# Altium PCB buck_automotive.PcbDoc
Units mm, origin at the board's own origin, x right, y up, seen from the top; angles counter-clockwise.
Board outline 100 x 17 mm, 4 copper layers (Top Layer, Layer 1, Layer 2, Bottom Layer), stack 1.561 mm thick; 81 components, 31 nets, 247 pads, 101 vias.
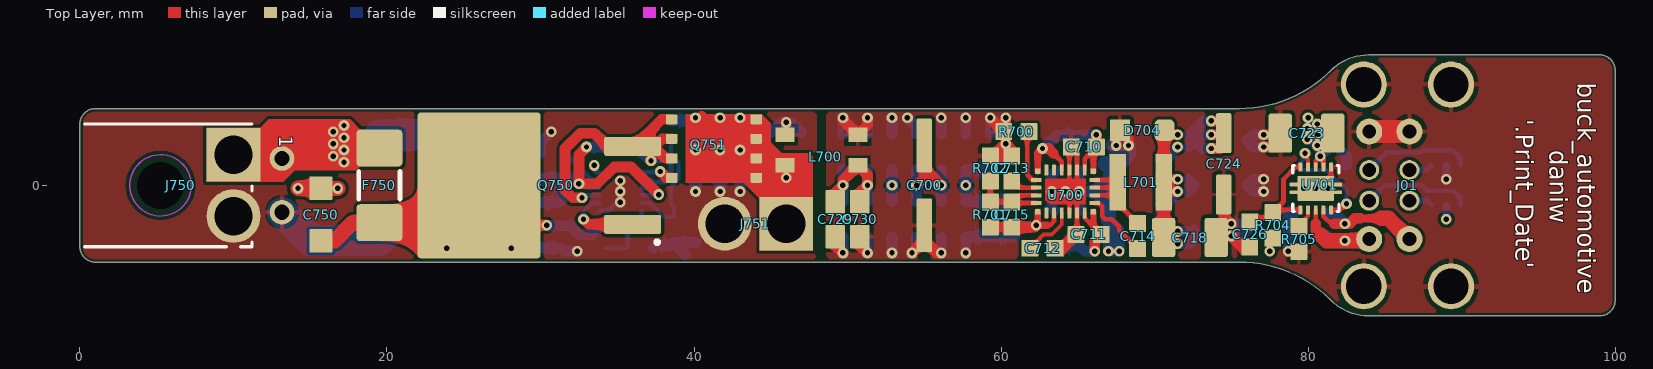
[diagram p0: Top Layer view]
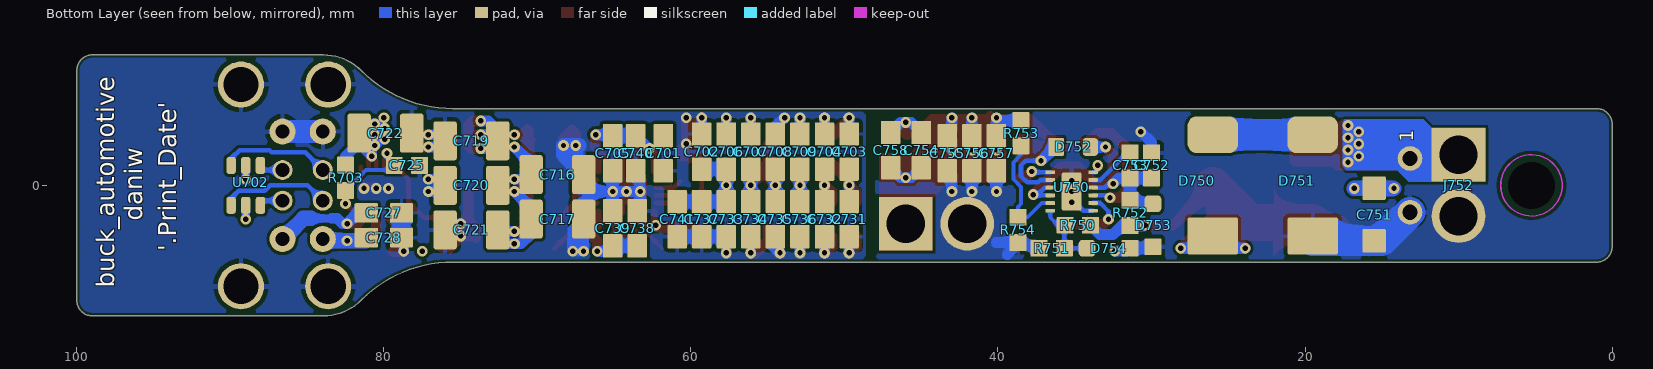
[diagram p1: Bottom Layer view, seen from below]
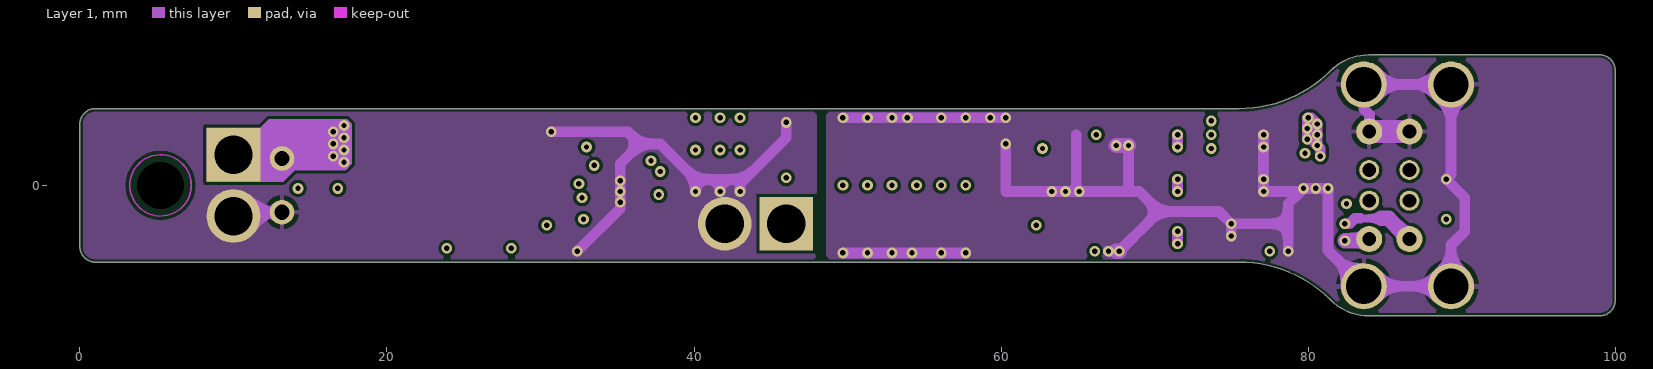
[diagram p2: Layer 1]
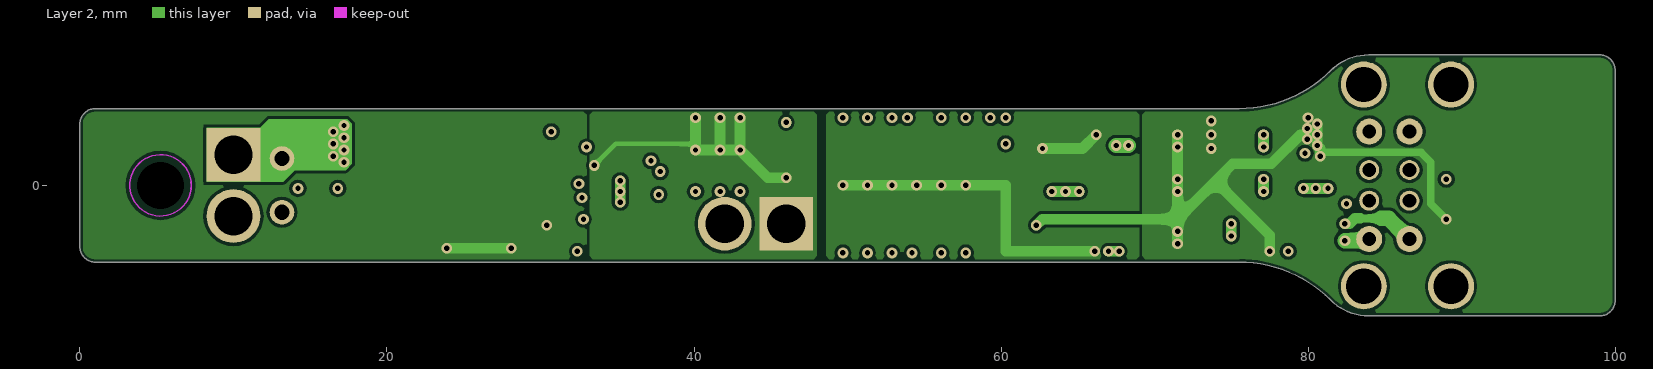
[diagram p3: Layer 2]

## Layer stack, top to bottom
Top Solder: solder mask 0.0102, Solder Resist, Dk 3.5
Top Layer: signal copper 0.0356
Dielectric 2: prepreg 0.11, PP-006, Dk 4.1
Layer 1: signal copper 0.035
Dielectric 1: dielectric 1.2, FR-4, Dk 4.8
Layer 2: signal copper 0.035
Dielectric 3: prepreg 0.11, PP-006, Dk 4.1
Bottom Layer: signal copper 0.0356
Bottom Solder: solder mask 0.0102, Solder Resist, Dk 3.5

## Board outline
0,-4 ccw(c1,-4) 1,-5 75.5,-5 cw(c75.5,-13.45) 81.475,-7.475 ccw(c83.95,-5) 83.95,-8.5 99,-8.5 ccw(c99,-7.5) 100,-7.5 100,7.5 ccw(c99,7.5) 99,8.5 83.95,8.5 ccw(c83.95,5) 81.475,7.475 cw(c75.5,13.45) 75.5,5 1,5 ccw(c1,4) 0,4

## Design rules (kind name [scope] priority, off if disabled: settings)
Clearance [All] p1: gap=0.2 ignorepadtopadclearanceinfootprint=FALSE except(0: Arc-Hole Track-Hole SMDPad-Hole THPad-Hole Via-Hole Fill-Hole Poly-Hole Region-Hole Text-Hole)
ComponentClearance [All] p1: gap=0.2 collisioncheckmode=3 verticalgap=0.2 showdistances=FALSE
HoleSize [All] p1: absolutevalues=TRUE maxlimit=3.2 minlimit=0.3 maxpercent=80.000 minpercent=20.000
HoleToHoleClearance [All] p1: gap=0.3 allowstackedmicrovias=TRUE
MinimumAnnularRing [All] p1: minimumring=0.15
MinimumSolderMaskSliver [All] p1: minsoldermaskwidth=0.1
PolygonConnect [All] p1: thpad.connectstyle=Relief thpad.reliefconductorwidth=0.3 thpad.reliefentries=4 thpad.polygonreliefangle="90 Angle" thpad.airgapwidth=0.3 smdpad.connectstyle=Relief smdpad.reliefconductorwidth=0.25 smdpad.reliefentries=4 smdpad.polygonreliefangle="90 Angle" smdpad.airgapwidth=0.25 via.connectstyle=Direct via.reliefconductorwidth=0.254 via.reliefentries=4 via.polygonreliefangle="90 Angle" via.airgapwidth=0.254
RoutingVias [All] p1: holewidth=0.35 width=0.7 viastyle="Through Hole" minholewidth=0.3 minwidth=0.65 maxholewidth=0.5 maxwidth=3
SilkToSilkClearance [All] p1: silktosilkclearance=0.1
SilkToSolderMaskClearance [IsPad] p1: minsilkscreentomaskgap=0.15 clearancetoexposedcopper=TRUE
SolderMaskExpansion SolderMaskExpansion_Via [IsVia] p1: expansion=0.102 istentingtop=TRUE
SolderMaskExpansion [All] p2: expansion=0.05 istentingtop=FALSE
Width [All] p1: maxlimit=5 minlimit=0.2 preferedwidth=0.2 minimp=50.000000 maximp=50.000000 favimp=50.000000
24 further rules are at their usual default settings.

## Classes and differential pairs
net class Converter: +5V BST DM1 DM2 DP1 DP2 EN1 EN2 FB GND ILIM INTVCC NetU700_1 NetU700_15 NetU700_16 RT SW TR/SS V_Bat_Filt VBUS1 VBUS2
net class Protection: CAP DG EN/UVLO GND_In HG NetC750_2 NetD750_K NetF750_1 NetU751_4 OV "V_ Bat_In" V_Bat V_Int VS

## Components (designator, comment, footprint, x,y, rotation, side; value= is the part's Value field where it differs from the comment)
C700 "100u, 50V" C_ELKO_SMD_6.6X6.6_7.7 55,0 r90 top
C701 "2.2u" C_0805_S 61.8,2.1 r270 bottom
C702 "2.2u" C_0805_S 59.3,2.2 r90 bottom
C703 "2.2u" C_0805_S 49.7,2.2 r90 bottom
C704 "2.2u" C_0805_S 51.3,2.2 r90 bottom
C705 "2.2u" C_0805_S 65.1,2.1 r270 bottom
C706 "2.2u" C_0805_S 57.7,2.2 r90 bottom
C707 "2.2u" C_0805_S 56.1,2.2 r90 bottom
C708 "2.2u" C_0805_S 54.5,2.2 r90 bottom
C709 "2.2u" C_0805_S 52.9,2.2 r90 bottom
C710 "1u" C_0603_S 65.4,2.5 r0 top
C711 "1u" C_0603_S 65.7,-3.2 r0 top
C712 "1u" C_0603_S 62.7,-4.1 r0 top
C713 "10n" C_0603_S 60.7,1.1 r270 top
C714 "1u" C_0603_S 68.9,-3.3 r90 top
C715 "10pF" C_0603_S 60.7,-1.9 r270 top
C716 "47u, 10V" C_1210_S 68.7,0.7 r180 bottom
C717 "47u, 10V" C_1210_S 68.7,-2.2 r180 bottom
C718 "47u, 10V" C_1210_S 72.3,-3.4 r0 top
C719 "47u, 10V" C_1210_S 74.3,2.9 r0 bottom
C720 "47u, 10V" C_1210_S 74.3,0 r0 bottom
C721 "47u, 10V" C_1210_S 74.3,-2.9 r0 bottom
C722 "47u, 10V" C_1210_S 79.9,3.4 r180 bottom
C723 "47u, 10V" C_1210_S 79.9,3.4 r180 top
C724 "100u, 10V" C_ELKO_SMD_5.3X5.3_5.4 74.5,1.4 r90 top
C725 "1uF" C_0603_S 78.5,1.3 r0 bottom
C726 "1uF" C_0603_S 76.2,-3.2 r90 top
C727 "10uF" C_0805_S 80,-1.8 r0 bottom
C728 "10uF" C_0805_S 80,-3.4 r0 bottom
C729 "2.2u" C_0805_S 49.2,-2.2 r270 top
C730 "2.2u" C_0805_S 50.8,-2.2 r270 top
C731 "2.2u" C_0805_S 49.7,-2.2 r270 bottom
C732 "2.2u" C_0805_S 51.3,-2.2 r270 bottom
C733 "2.2u" C_0805_S 57.7,-2.2 r270 bottom
C734 "2.2u" C_0805_S 56.1,-2.2 r270 bottom
C735 "2.2u" C_0805_S 54.5,-2.2 r270 bottom
C736 "2.2u" C_0805_S 52.9,-2.2 r270 bottom
C737 "2.2u" C_0805_S 59.3,-2.2 r270 bottom
C738 "2.2u" C_0805_S 63.5,-2.8 r90 bottom
C739 "2.2u" C_0805_S 65.1,-2.8 r90 bottom
C740 "2.2u" C_0805_S 63.6,2.1 r270 bottom
C741 "2.2u" C_0805_S 60.9,-2.2 r270 bottom
C750 "0.1uF" C_1206_S 15.7,-1.9 r90 top
C751 "0.1uF" C_1206_S 15.5,-1.9 r270 bottom
C752 "1uF" C_0603_S 30,1.3 r270 bottom
C753 "0.1uF" C_0603_S 31.4,1.3 r90 bottom
C754 "2.2u" C_0805_S 45,2.3 r90 bottom
C755 "2.2u" C_0805_S 43.3,2.1 r270 bottom
C756 "2.2u" C_0805_S 41.7,2.1 r270 bottom
C757 "2.2u" C_0805_S 40.1,2.1 r270 bottom
C758 "2.2u" C_0805_S 47,2.3 r90 bottom
D704 "SMF5.0A" SOD123FL 69.2,3.6 r0 top
D750 "5.0SMDJ22A" DO-214AB 26,0 r90 bottom
D751 "5.0SMDJ22A" DO-214AB 19.5,0 r90 bottom
D752 "BAS21HT1G" SOD-323 35.1,2.5 r180 bottom
D753 "PTVS60VS1UR" SOD123W 29.9,-4 r90 bottom
D754 "PTVS60VS1UR" SOD123W 31.4,-4.1 r0 bottom
F750 "500mA" "LITTELFUSE 157SERIE" 19.5,0 r270 top
J01 "CON-USBR-A-D-S-O-TH" CON-USBR-A-D-S-O-TH 100.01,0 r90 top
J750 "CON-Molex-Ultrafit-2-RA" CON-MOLEX-ULTRAFIT-172310-1X02 0,0 r270 top
J751 "CON2" HEADER_2_RM_2.54 44,-2.5 r180 top
J752 "CON2" HEADER_2_RM_2.54 10,0 r270 bottom
L700 "ACM4520-901-2P" ACM4520-2P 48.3,2.3 r180 top
L701 "3.3uH" 4020 69.1,0.2 r0 top
Q750 "FDB52N20TM" TO-263-3-2 29.9,0 r180 top
Q751 "FDMS86380-F085" SON5X6 41.3,2.4 r0 top
R700 "39k" R_0603_S 61,3.5 r0 top
R701 "100k" R_0603_S 59.3,-1.9 r90 top
R702 "24.9k" R_0603_S 59.3,1.1 r90 top
R703 "100k" R_0603_S 82.5,0.5 r270 bottom
R704 "100k" R_0603_S 77.7,-2.6 r90 top
R705 "22k" R_0603_S 79.4,-3.5 r270 top
R750 "33k" R_0603_S 34.8,-2.6 r0 bottom
R751 "16k" R_0603_S 36.5,-4.1 r0 bottom
R752 "10k" R_0603_S 31.4,-1.8 r90 bottom
R753 "100k" R_0603_S 38.5,3.4 r270 bottom
R754 "392k" R_0603_S 38.7,-2.9 r270 bottom
U700 "LT8636" LQFN_20_4X3 64.2,-0.4 r90 top
U701 "TPS2561A-Q1" SON50P300X300X100-10-EP_TI-DRC010J 80.5,-0.2 r270 top
U702 "TPS2513A-Q1" SOT23-6P95_300X305X145L60 89,0 r270 bottom
U750 "LM74801-Q1_CS" SON50P300X300X80-12-EP250X130X 35.2,-0.4 r180 bottom

## Footprints (in the part's own frame and the unit in brackets; to place one, negate y for a bottom-side part, rotate by r counter-clockwise, add the part's x,y. Pads: shape width x height; smd on the part's side, far side on the other; paste and mask are expansions set on the pad)
4020 [mm] "4020 Inductance"
  rrect10% 1.1x3.7 smd: 1(-1.5,0) 2(1.5,0)
  body extent -2,-2 2.01,2, height 2.1
ACM4520-2P [mm] "2x CM Choke"
  round 0.4 on Top Overlay: 1(-2.9,1.9)
  rect 1.25x0.95 smd: 1(-2.375,1) 2(-2.375,-1) 3(2.375,-1) 4(2.375,1)
  body extent -2.35,-2.25 2.35,2.25, height 1.89
C_0603_S [mm]
  rrect10% 1.1x1.1 smd: 1(-0.825,0) 2(0.825,0)
  body extent -0.8,-0.4 0.8,0.4, height 0.8
C_0805_S [mil]
  rrect10% 60x50 smd: 1(-45,0) 2(45,0)
  body extent -40,-25 40,25, height 51
C_1206_S [mil]
  rrect10% 60x60 smd: 1(-67.5,0) 2(67.5,0)
  body extent -60,-30 60,30, height 65
C_1210_S [mil]
  rrect20% 60x100 smd: 1(-67.5,0) 2(67.5,0)
  body extent -63,-49 63,49, height 98
C_ELKO_SMD_5.3X5.3_5.4 [mm] "Electrolyt capacitor, SMD, 5.3X5.3mm Height 5.4mm"
  rrect20% 2.6x1 smd: 1(2,0) 2(-2,0)
  body extent -2.8,-2.65 2.8,2.65, height 5.41
C_ELKO_SMD_6.6X6.6_7.7 [mm] "Electrolyt capacitor, SMD, 6.6x6.6mm Height 7.7mm"
  rrect20% 3.5x1 smd: 1(2.6,0) 2(-2.6,0)
  body extent -3.9,-3.3 3.9,3.3, height 7.71
CON-MOLEX-ULTRAFIT-172310-1X02 [mm] "Molex Ultra-Fit 2 pin, right angleblack"
  round 0 hole 3.05 unplated: 0(0,5.25)
  round 0.4 on Mech16: 0(0,0)
  round 1.6 hole 1: 1(-1.75,13.16) 2(1.75,13.16)
  silkscreen extent -4,0.3 4,11.2, body extent -4.5,-2.15 4.5,13.48, height 8.96
CON-USBR-A-D-S-O-TH [mm] "Samtec USBR-A-D-S-O-TH"
  round 1.7 hole 0.9: 1(-3.5,13.41) 4(3.5,13.41) 5(-3.5,16.03) 8(3.5,16.03)
  round 1.3 hole 0.9: 2(-1,13.41) 3(1,13.41) 6(-1,16.03) 7(1,16.03)
  round 3 hole 2.3: 9(-6.57,16.38) 9(-6.57,10.7) 9(6.57,16.38) 9(6.57,10.7)
  body extent -7.8,0 7.8,17.65, height 16.1
DO-214AB [mm] "Diode"
  round 0.4 on Bottom Overlay: 1(3.9,2.1)
  rrect10% 2.4x3.3 smd: A(-3.3,0)
  rrect50% 2.4x3.3 smd: K(3.3,0)
  body extent -3.95,-2.95 3.95,2.95, height 2.26
HEADER_2_RM_2.54 [mm] "Header 2 Pin 2.54mm"
  rect 3.5x3.5 hole 2.5: 1(-2,0)
  round 3.5 hole 2.5: 2(2,0)
"LITTELFUSE 157SERIE" [mm]
  rrect20% 2.4x3 smd: 1(-2.43,0) 2(2.43,0)
  silkscreen extent -0.9,-1.35 0.9,1.35, body extent -3.35,-1.95 3.35,1.96, height 3.9
LQFN_20_4X3 [mm] "20-Lead (4mm × 3mm × 0.94mm)"
  rect 0.5x0.5 on Top Paste: 0(-0.366,0.434) 0(-0.366,-0.434) 0(0.366,-0.434) 0(0.366,0.434)
  round 0.4 on Top Overlay: 1(-1.9,1.8)
  rrect30% 0.7x0.25 smd: 1(-1.4,1.25) 2(-1.4,0.75) 3(-1.4,0.25) 4(-1.4,-0.25) 5(-1.4,-0.75) 6(-1.4,-1.25) 11(1.4,-1.25) 12(1.4,-0.75) 13(1.4,-0.25) 14(1.4,0.25) 15(1.4,0.75) 16(1.4,1.25)
  rrect30% 0.25x0.7 smd: 7(-0.75,-1.9) 8(-0.25,-1.9) 9(0.25,-1.9) 10(0.75,-1.9) 17(0.75,1.9) 18(0.25,1.9) 19(-0.25,1.9) 20(-0.75,1.9)
  rect 0.1x0.1 smd paste-0.102: 21(0,0)
  rect 0.7x0.25 smd: 21(0,0)
  rrect30% 0.375x0.375 smd: M(-1.312,1.813) M(-1.312,-1.813) M(1.312,1.813) M(1.312,-1.813)
  Top Layer region: 0.825,-1.325 0.825,1.325 -0.586,1.325 -0.825,1 -0.825,-1.325
  body extent -1.5,-2 1.5,2, height 0.85
R_0603_S [mm]
  rrect10% 1.1x1.1 smd: 1(-0.825,0) 2(0.825,0)
  body extent -0.8,-0.4 0.8,0.4, height 1.25
SOD123FL [mm]
  rrect10% 1.3x1.4 smd: A(-1.45,0)
  rrect50% 1.3x1.4 smd: K(1.45,0)
  body extent -1.45,-1 1.45,1, height 1.1
SOD123W [mm]
  rrect15% 1.1x1.1 smd: A(0,0)
  rrect50% 1.1x1.1 smd: K(2.8,0)
  body extent 0.05,-0.71 2.79,0.81, height 1.3
SOD-323 [mm] "SOD-323"
  rrect15% 1x1.2 smd: A(-1.115,0)
  rrect50% 1x1.2 smd: K(1.115,0)
  body extent -1.35,-0.68 1.35,0.68, height 1.11
SON5X6 [mm] "VSONP (DQJ)"
  round 0.4 on Top Overlay: 1(-3.5,2.4)
  rrect20% 0.75x0.65 smd: D(2.75,-1.905) D(2.75,-0.635) D(2.75,0.635) D(2.75,1.905) G(-2.75,-1.905) S(-2.75,-0.635) S(-2.75,0.635) S(-2.75,1.905)
  Top Layer region: -1.825,2.23 -1.825,-2.23 3.125,-2.23 3.125,-1.58 2.475,-1.58 2.475,-0.96 3.125,-0.96 3.125,-0.31 2.475,-0.31 2.475,0.31 3.125,0.31 3.125,0.96 2.475,0.96 2.475,1.58 3.125,1.58 3.125,2.23
  body extent -3.13,-2.45 3.13,2.45, height 1.15
SON50P300X300X80-12-EP250X130X [mm] "SON, 0.5mm Pitch, 3mm x 3mm, 0.8mm Height, 12 Pin, Exposed Pad (TI DRR012E)"
  round 0.4 on Bottom Overlay: 1(-1.4,1.8)
  rrect50% 0.62x0.25 smd: 1(-1.39,1.25) 2(-1.39,0.75) 3(-1.39,0.25) 4(-1.39,-0.25) 5(-1.39,-0.75) 6(-1.39,-1.25) 7(1.39,-1.25) 8(1.39,-0.75) 9(1.39,-0.25) 10(1.39,0.25) 11(1.39,0.75) 12(1.39,1.25)
  rrect20% 1.21x1.1 on Bottom Paste: EP(0,-0.65) EP(0,0.65)
  rrect20% 1.3x2.5 smd paste-1.3: EP(0,0)
  body extent -1.5,-1.5 1.5,1.5, height 0.8
SON50P300X300X100-10-EP_TI-DRC010J [mm] "SON, 0.5mm Pitch, 3mm x 3mm, 1.0mm Height, 10 Pin, Exposed Pad (TI DRC010J)"
  round 0.4 on Top Overlay: 1(-1.9,1.5)
  rrect50% 0.6x0.25 smd: 1(-1.4,1) 2(-1.4,0.5) 3(-1.4,0) 4(-1.4,-0.5) 5(-1.4,-1) 6(1.4,-1) 7(1.4,-0.5) 8(1.4,0) 9(1.4,0.5) 10(1.4,1)
  rrect50% 0.25x3.4 smd: EP(-0.25,0) EP(0.25,0)
  rrect10% 1.65x2.4 smd: EP(0,0)
  silkscreen extent -1.5,-1.5 1.5,1.5, body extent -1.5,-1.5 1.5,1.5, height 1
SOT23-6P95_300X305X145L60 [mm] "SOT23-6 (TI DBV0006A)"
  round 0.4 on Bottom Overlay: 1(-1.7,1.6)
  rrect50% 1.1x0.6 smd: 1(-1.3,0.95) 2(-1.3,0) 3(-1.3,-0.95) 4(1.3,-0.95) 5(1.3,0) 6(1.3,0.95)
  body extent -1.4,-1.45 1.4,1.45, height 1.2
TO-263-3-2 [mm]
  rrect20% 3.7x1.25 smd: 1(-6.1,2.54) 3(-6.1,-2.54)
  rrect5% 8x9.5 smd: 2(3.9,0)
  silkscreen extent -7.83,3.58 -7.58,3.82, body extent -7.12,-5.08 7.12,5.08, height 4.87

## Part data
C700: library part C_Elko, Capacitance=100uF, Case/Package=Radial, ESR (Equivalent Series Resistance)=340mR, Leakage Current=50uA, Manufacturer=Panasonic, Manufacturer Part Number=EEE-FTH101XAP, Max Operating Temperature=105°C, Min Operating Temperature=-55°C, Package Quantity=1, Ripple Current=350mA, Supplier Part Number 1=667-EEE-FTH101XAP, Tolerance=20%, Voltage=50V, ComponentLink1Description=http://uk.rs-online.com/webdocs/0f49/0900766b80f4973e.pdf, ComponentLink1URL=http://uk.rs-online.com/webdocs/0f49/0900766b80f4973e.pdf, ComponentLink2Description=https://www.distrelec.biz/Web/Downloads/_t/ds/smd_ft_eng_tds.pdf?mime=application%2Fpdf, ComponentLink2URL=https://www.distrelec.biz/Web/Downloads/_t/ds/smd_ft_eng_tds.pdf?mime=application%2Fpdf, ComponentLink3Description=http://www.farnell.com/datasheets/1244238.pdf, ComponentLink3URL=http://www.farnell.com/datasheets/1244238.pdf, ComponentLink4Description=http://www.farnell.com/datasheets/1898066.pdf, ComponentLink4URL=http://www.farnell.com/datasheets/1898066.pdf, ComponentLink5Description=http://www.farnell.com/datasheets/1790597.pdf, ComponentLink5URL=http://www.farnell.com/datasheets/1790597.pdf, ComponentLink6Description=http://www.mouser.com/ds/2/315/ABA0000C573-947481.pdf, ComponentLink6URL=http://www.mouser.com/ds/2/315/ABA0000C573-947481.pdf, ComponentLink7Description=http://industrial.panasonic.com/www-data/pdf/ABA0000/ABA0000CE135.pdf, ComponentLink7URL=http://industrial.panasonic.com/www-data/pdf/ABA0000/ABA0000CE135.pdf, Contact Plating=Tin, Diameter=6.3mm, Height=7.7mm, Height - Seated (Max)=0.315inch, Lead Diameter=0.65mm, Lead Pitch=1.8mm, Length=7.7mm, Life (Hours)=2000Hour, Mount="PCB,Surface Mount", Number of Pins=2, Packaging="Tape and Reel", Pricing 1="1=0.92, 10=0.575, 50=0.575, 100=0.383, 1000=0.25, 10000=0.196 (USD)", Radiation Hardening=No, REACH SVHC="No SVHC", Ripple Current (AC)=350mA, Stock 1=75815, Supplier 1=Mouser, Termination=SMD/SMT, Voltage Rating=50V, Voltage Rating (DC)=50V
C701 C702 C703 C704 C705 C706 C707 C708 C709 C729 C730 C731 C732 C733 C734 C735 C736 C737 C738 C739 C740 C741 C754 C755 C756 C757 C758: library part C, "0805, 50V"
C710 C711 C712 C713 C714 C715: library part C, "0603, >25V"
C716 C717 C718 C719 C720 C721 C722 C723: library part C, "10V 0805"
C724: library part C, "10V ELKO"
C725 C726 C752 C753: library part C
C727 C728: library part C, "0805"
C750 C751: library part C, "100V"
D704: library part Schottky
D750: library part TVS_BI, Supplier Part Number 1=576-5.0SMDJ22A, Supplier 1=Mouser, Supplier 2=Digi-Key, Supplier Part Number 2=18-5.0SMDJ22ACT-ND
D751: library part TVS, Supplier Part Number 1=576-5.0SMDJ22A, Supplier 1=Mouser, Supplier 2=Digi-Key, Supplier Part Number 2=18-5.0SMDJ22ACT-ND
D752: library part D?, "Diode", Supplier Part Number 1=863-BAS21HT1G, Supplier 1=Mouser, Supplier 2=Digi-Key, Supplier Part Number 2=BAS21HT1GOSCT-ND
D753 D754: library part TVS, Supplier Part Number 1=771-PTVS60VS1UR115, Supplier 1=Mouser, Supplier 2=Digi-Key, Supplier 3=Digi-Key, Supplier Part Number 2=1727-5879-1-ND, Supplier Part Number 3=1727-5879-6-ND
F750: library part FUSE, "Fuse", Supplier Part Number 1=F2960CT-ND, Supplier 1=Digi-Key, Supplier 2=Mouser, Supplier Part Number 2=576-0157.500DR
J01: "Samtec USBR-A-D-S-O-TH", Supplier Part Number 1=SAM10377-ND, Supplier 1=Digi-Key, Supplier 2=Mouser, Supplier Part Number 2=200-USBRADSOTH
J750: "Molex Ultrafit 2 pin Right-angle", Supplier Part Number 1=WM11825-ND, Supplier 1=Digi-Key, Supplier 2=Mouser, Supplier Part Number 2=538-172310-1302
L700: library part L_2ph_cm_small, "2 Phase Common Mode Choke", Supplier Part Number 1=445-6137-1-ND, Supplier 1=Digi-Key, Supplier 2=Digi-Key, Supplier 3=Mouser, Supplier Part Number 2=445-6137-6-ND, Supplier Part Number 3=810-ACM45209012PT000
L701: library part L, "Inductor", Supplier Part Number 1=P124171DKR-ND, Supplier 1=Digi-Key, Supplier 2=Mouser, Supplier Part Number 2=667-ETQ-P4M3R3KFN
Q750: library part "MOSFET N", Supplier Part Number 1=FDB52N20TMCT-ND, Supplier 1=Digi-Key, Supplier 2=Mouser, Supplier Part Number 2=512-FDB52N20TM
Q751: library part "MOSFET N", Supplier Part Number 1=512-FDMS86380_F085, Supplier 1=Mouser, Supplier 2=Digi-Key, Supplier Part Number 2=FDMS86380-F085CT-ND
R700 R701 R702 R703 R704 R705: library part R?, "Normaler Widerstand"
R750 R751 R752 R753 R754: library part R, "Normaler Widerstand"
U700: "42V, 5A/7A Peak Synchronous Step-Down Silent Switcher with 2.5μA Quiescent Current", Supplier Part Number 1=161-LT8636EV#PBF-ND, ComponentLink1Description=Datasheet, ComponentLink1URL=https://www.mouser.ch/datasheet/2/609/LT8636-1674249.pdf, HelpURL=https://www.mouser.ch/datasheet/2/609/LT8636-1674249.pdf, Supplier 1=Digi-Key, Supplier 2=Mouser, Supplier Part Number 2=584-LT8636EV#PBF
U701: "TPS2561A-Q1 Dual Channel Precision Automotive Adjustable Current-Limited Power Switches", Supplier Part Number 1=595-TPS2561AQDRCRQ1, Supplier 1=Mouser, Supplier 2=Digi-Key, Supplier 3=Mouser, Supplier Part Number 2=296-TPS2561AQDRCTQ1CT-ND, Supplier Part Number 3=595-TPS2561AQDRCTQ1
U702: "TPS2513A-Q1 USB Dedicated Charging Port Controller", Supplier Part Number 1=595-TPS2513AQDBVRQ1, Supplier 1=Mouser, Supplier 2=Digi-Key, Supplier Part Number 2=296-TPS2513AQDBVTQ1CT-ND
U750: "LM74801-Q1 - Ideal Diode Controller with Load Dump Protection / Pin placement for common source application", Supplier Part Number 1=296-LM74801QDRRRQ1CT-ND, Supplier 1=Digi-Key, Supplier 2=Mouser, Supplier Part Number 2=595-LM74801QDRRRQ1

## Via types
v1: diameter 0.7, hole 0.35, Top Layer to Bottom Layer, tented both sides, 101 vias

## Nets (pads, with @x,y where several pads share a name; then routed paths per layer and width w, separated by ;. In a path a pad name is that pad's centre, name@x,y a point inside that pad or via, vN(x,y) a via of type N, cw(c..) or ccw(c..) an arc to the next point about the centre after c; other vN are vias at no path point)
+5V: C715.2 C716.1 C717.1 C718.1 C719.1 C720.1 C721.1 C722.1 C723.1 C724.1 D704.K L701.2 R701.1 R703.1 R704.1 U700.2 U700.M@62.387,-1.713 U701.2 U701.3 U702.5 | length 108.2
  Top Layer w0.3: 63,-2.6 63.2,-2.6 63.45,-2.35 U700.2 ; U701.3 80.5,1.6 v1(80.8,1.9) 81,1.7 U701.2
  Top Layer w0.4: v1(62.3,-2.6) 62.387,-2.513 U700.M@62.387,-1.713
  Top Layer w0.5: R701.1 C715.2 ; v1(62.3,-2.6) 63,-2.6
  Top Layer w0.7: C715.2 62.175,-2.725 v1(62.3,-2.6) ; C718.1 C718.1@70.6,-3.385 ; v1(71.5,-3.8) 71.015,-3.8 C718.1@70.6,-3.385 ; v1(71.5,-3) 70.986,-3 C718.1@70.6,-3.385 ; v1(71.5,-0.4) 71.2,-0.4 L701.2 ; v1(71.5,0.4) 70.8,0.4 L701.2 ; v1(71.5,3.3) 70.95,3.3 D704.K 70.6,3.55 L701.2 ; v1(73.7,2.4) 74.3,2.4 74.5,2.6 C724.1 ; v1(73.7,3.3) 74.4,3.3 C724.1 ; v1(73.7,4.2) 74.2,4.2 74.5,3.9 C724.1 ; C718.1@70.6,-3.385 L701.2
  Layer 1 w0.7: v1(71.5,-3.8) v1(71.5,-3) ; v1(71.5,-0.4) v1(71.5,0.4) ; v1(71.5,2.5) v1(71.5,3.3) ; v1(80.8,1.9) 80.8,2.4 v1(80.6,2.6) ; v1(79.95,3.7) 80.3,3.7 v1(80.6,4) ; v1(79.95,3.7) 79.95,4.35 v1(80,4.4) 80.2,4.4 v1(80.6,4) ; v1(79.95,3.7) v1(79.95,3) 80.2,3 v1(80.6,2.6) ; v1(80.6,2.6) v1(80.6,3.3) v1(80.6,4)
  Layer 2 w0.5: 81.05,2.15 87.35,2.15 88,1.5 88,-1.2 v1(89,-2.2)
  Layer 2 w0.7: v1(62.3,-2.6) 62.7,-2.2 71.5,-2.2 ; v1(71.5,-3.8) v1(71.5,-3) 71.5,-2.2 ; v1(71.5,3.3) v1(71.5,2.5) v1(71.5,0.4) v1(71.5,-0.4) 71.5,-2.2 ; v1(77.5,-4.3) 77.5,-3.249 73.976,0.276 ; v1(80.6,4) v1(80.6,3.3) ; v1(80.8,1.9) 80.8,2.15 80.8,2.4 v1(80.6,2.6) v1(80.6,3.3) ; 71.5,-2.2 73.976,0.276 ; 73.976,0.276 75.1,1.4 77.6,1.4 79.5,3.3 79.95,3.3 v1(80.6,3.3)
  Bottom Layer w0.5: v1(89,-2.2) U702.5
  Bottom Layer w0.7: v1(71.5,-3) 72.485,-3 C721.1 72.586,-3.514 72.3,-3.8 v1(71.5,-3.8) 71.1,-3.8 70.415,-3.115 C717.1 70.415,-1.486 v1(71.5,-0.4) ; v1(71.5,0.4) 71,0.4 70.415,0.985 70.415,1.414 v1(71.5,2.5) ; C720.1@72.186,-0.4 C720.1 C720.1@72.186,0.4 ; C719.1@72.186,2.5 C719.1 ; C719.1@72.186,3.3 C719.1 ; v1(73.7,2.4) 73.086,2.4 C719.1 ; v1(73.7,3.3) 72.986,3.3 C719.1 ; v1(73.7,4.2) 73.2,4.2 72.586,3.585 C719.1 ; v1(80.6,3.3) C722.1@81.515,3.3 ; R703.1 82.5,1.9 C722.1@81.615,2.786 ; v1(80.6,2.6) 80.8,2.4 v1(80.8,1.9) 81.615,2.714 C722.1@81.615,2.786 ; v1(80.6,2.6) 80.2,3 v1(79.95,3) v1(79.95,3.7) 80.3,3.7 v1(80.6,4) 81.015,4 C722.1 ; v1(80.6,2.6) 80.815,2.6 C722.1@81.515,3.3 ; C722.1@81.515,3.3 C722.1 ; C722.1@81.615,2.786 C722.1
BST: C714.1 U700.7 | length 4.5
  Top Layer w0.3: U700.7 66.35,-1.15 66.6,-1.4 66.6,-2 66.8,-2.2 67.2,-2.2 67.7,-2.7 67.7,-2.925 C714.1
CAP: C753.2 U750.11 | length 3.1
  Bottom Layer w0.3: C753.2 31.575,2.125 33.35,0.35 U750.11
DG: Q751.G U750.1@36.59,0.85 | length 2.1
  Top Layer w0.7: v1(37.8,0.9) 38.205,0.495 Q751.G
  Bottom Layer w0.3: U750.1@36.59,0.85 37.75,0.85 v1(37.8,0.9)
DM1: J01.2 U702.6 | length 1.6
  Bottom Layer w0.3: J01.2 87.75,-1 U702.6
DM2: J01.6 U702.4 | length 7.2
  Bottom Layer w0.3: J01.6 84.98,0 87.4,0 87.75,-0.35 89.45,-0.35 89.95,-0.85 U702.4
DP1: J01.3 U702.1@88.05,1.3 | length 1.6
  Bottom Layer w0.3: J01.3 87.75,1 U702.1@88.05,1.3
DP2: J01.7 U702.3 | length 7.2
  Bottom Layer w0.3: J01.7 85.13,2.15 87.3,2.15 87.45,2.3 89.4,2.3 89.95,1.75 U702.3
EN1: C725.2 R703.2 U701.4 U701.10 | length 7.9
  Top Layer w0.25: v1(79.8,2.1) 79.8,1.9 80,1.7 U701.4 ; U701.10 82.1,-1.6 v1(82.5,-1.2)
  Bottom Layer w0.25: v1(79.8,2.1) 79.8,1.775 C725.2 79.625,1 81.175,1 R703.2 v1(82.5,-1.2)
EN2: C726.2 R704.2 U701.5 U701.6 | length 7.3
  Top Layer w0.3: C726.2 76.475,-2.1 77.375,-2.1 R704.2 R704.2@77.875,-1.6 ; U701.6 R704.2@77.875,-1.6 ; U701.5 79.2,1.2 78.4,0.4 78.4,-1.075 R704.2@77.875,-1.6
EN/UVLO: D754.K R750.2 R751.1 U750.6 | length 4.6
  Bottom Layer w0.25: D754.K R751.1 35.675,-2.65 R750.2 36.1,-2.6 36.59,-2.11 U750.6
FB: C715.1 R701.2 R702.1 U700.19 U700.20 | length 6.2
  Top Layer w0.3: R702.1 R701.2 C715.1 ; U700.20 60.775,-1.15 C715.1 ; U700.19 61.125,-0.65 C715.1
GND: C700.2 C701.2 C702.2 C703.2 C704.2 C705.2 C706.2 C707.2 C708.2 C709.2 C710.1 C711.1 C712.2 C713.1 C716.2 C717.2 C718.2 C719.2 C720.2 C721.2 C722.2 C723.2 C724.2 C725.1 C726.1 C727.1 C728.1 C729.2 C730.2 C731.2 C732.2 C733.2 C734.2 C735.2 C736.2 C737.2 C738.2 C739.2 C740.2 C741.2 D704.A J01.4 J01.8 J01.9 L700.2 R700.1 R702.2 R705.2 U700.4 U700.5 U700.12 U700.13 U700.21 U701.1@81.5,1.2 U701.EP U702.2 | length 209.7
  Top Layer w0.3: U700.4 64.45,-0.65 ; C711.1 64.95,-3.125 U700.5 64.95,-1.15 64.45,-0.65 ; v1(80.5,-0.2) 80.6,-0.2 U701.EP@80.85,0.05 ; U701.EP@80.5,0.05 U701.EP@80.85,0.05 ; U701.1@81.5,1.2 81.5,0.3 81.25,0.05 U701.EP@80.85,0.05 ; 64.45,-0.65 v1(64.2,-0.4) 64.45,-0.15 ; 64.45,-0.15 U700.13 64.45,2.375 C710.1 64.95,2.125 U700.12 64.95,0.35 64.45,-0.15
  Top Layer w0.7: C729.2 49.2,-3.9 v1(49.7,-4.4) ; v1(49.7,4.4) 49.7,4.275 L700.2 51.3,3.925 v1(51.3,4.4) ; C730.2 50.8,-3.9 v1(51.3,-4.4) ; v1(54.2,-4.4) C700.2@55,-3.6 ; C700.2 C700.2@55,-3.6 ; v1(56.1,-4.4) 55.8,-4.4 C700.2@55,-3.6 ; R702.2 R702.2@59.525,1.925 ; v1(59.3,4.4) 59.3,4.375 R700.1 ; v1(60.3,4.4) 60.3,3.625 R700.1 ; C712.2 63.975,-4.1 C711.1 ; v1(67.5,2.6) 67.5,3.35 D704.A 68.3,3.05 v1(68.3,2.6) ; C724.2 74.5,-2 ; C726.1 75.725,-4.025 v1(75,-3.3) 74.115,-3.3 C718.2 74.015,-2.786 C718.2@74.3,-2.5 ; v1(77.1,2.5) 78,2.5 78.186,2.685 C723.2 78.086,3.3 v1(77.1,3.3) ; v1(78.7,-4.3) 78.725,-4.325 R705.2 ; R702.2@59.525,1.925 v1(60.3,2.7) ; R702.2@59.525,1.925 C713.1 60.7,2.3 v1(60.3,2.7) ; R700.1 60.3,3.375 v1(60.3,2.7) ; C718.2@74.3,-2.5 74.5,-2.3 74.5,-2 ; C718.2@74.3,-2.5 v1(75,-2.5) 74.5,-2
  Top Layer w1.5: J01.8 J01.4
  Layer 1 w0.7: v1(49.7,-4.4) v1(51.3,-4.4) v1(52.9,-4.4) v1(54.2,-4.4) v1(56.1,-4.4) v1(57.7,-4.4) ; v1(49.7,4.4) v1(51.3,4.4) v1(52.9,4.4) v1(53.9,4.4) v1(56.1,4.4) v1(57.7,4.4) v1(59.3,4.4) v1(60.3,4.4) ; v1(60.3,2.7) 60.3,-0.4 v1(63.3,-0.4) v1(64.2,-0.4) 64.6,-0.4 ; 64.9,3.3 64.9,-0.1 64.6,-0.4 ; v1(67,-4.3) v1@67.5,-4.3 ; v1(67.7,-4.3) 70.3,-1.7 ; v1(68.3,2.6) 68.3,-0.4 ; v1(75,-3.3) v1(75,-2.5) ; v1(77.1,3.3) v1(77.1,2.5) v1(77.1,0.4) v1(77.1,-0.4) v1@79.5,-0.4 ; v1(78.7,-4.3) 78.7,-2.5 ; J01.8 84,3.52 84,4.6 83.63,4.97 83.63,6.57 89.31,6.57 89.31,0.71 v1(89,0.4) 90.2,-0.8 90.2,-3 89.31,-3.89 89.31,-6.57 83.63,-6.57 81.3,-4.24 v1(81.3,-0.2) v1(80.5,-0.2) v1(79.7,-0.2) v1@79.5,-0.4 ; 64.6,-0.4 v1(65.1,-0.4) 68.3,-0.4 ; 68.3,-0.4 69,-0.4 70.3,-1.7 ; 70.3,-1.7 74.2,-1.7 v1(75,-2.5) ; v1(75,-2.5) 78.7,-2.5 ; 78.7,-2.5 78.7,-1.2 v1@79.5,-0.4
  Layer 1 w1: v1@67.5,-4.3 v1(67.7,-4.3) ; v1(67.5,2.6) v1(68.3,2.6)
  Layer 1 w1.5: J01.8 J01.4
  Layer 2 w0.7: v1(63.3,-0.4) v1(64.2,-0.4) v1(65.1,-0.4) ; v1(67,-4.3) v1(67.7,-4.3) ; v1(75,-3.3) v1(75,-2.5) ; v1(77.1,-0.4) v1(77.1,0.4) ; v1(77.1,2.5) v1(77.1,3.3) ; v1(79.7,-0.2) v1(80.5,-0.2) v1(81.3,-0.2)
  Layer 2 w1: v1(67.5,2.6) v1(68.3,2.6)
  Bottom Layer w0.5: v1(89,0.4) U702.2
  Bottom Layer w0.7: v1(49.7,-4.4) C731.2 ; C703.2 v1(49.7,4.4) ; v1(51.3,-4.4) C732.2 ; C704.2 v1(51.3,4.4) ; v1(52.9,-4.4) C736.2 ; C709.2 v1(52.9,4.4) ; v1(53.9,4.4) 54.5,3.8 C708.2 ; v1(54.2,-4.4) 54.5,-4.1 C735.2 ; v1(56.1,-4.4) C734.2 ; C707.2 v1(56.1,4.4) ; v1(57.7,-4.4) C733.2 C737.2 C741.2 ; C706.2 v1(57.7,4.4) ; C702.2 v1(59.3,4.4) ; C738.2 63.3,-1.457 v1(63.3,-0.4) ; C740.2 63.3,0.657 v1(63.3,-0.4) ; C739.2 v1(65.1,-0.4) ; C705.2 v1(65.1,-0.4) ; C717.2@66.986,-1.186 66.2,-0.4 ; C716.2 66.986,0.386 66.2,-0.4 ; C717.2@67,-2.686 67,-3.6 ; C717.2@67.228,-2.443 67.7,-2.914 v1(67.7,-4.3) ; v1(75,-3.3) 75.615,-3.3 C721.2 75.615,-2.5 v1(75,-2.5) ; v1(77.1,-0.4) 76.415,-0.4 C720.2 76.415,0.4 v1(77.1,0.4) ; v1(77.1,2.5) 76.415,2.5 C719.2 76.415,3.3 v1(77.1,3.3) ; v1(78.7,-4.3) 78.7,-3.557 C728.1 ; v1(63.3,-0.4) v1(64.2,-0.4) v1(65.1,-0.4) ; v1(65.1,-0.4) 66.2,-0.4 ; 67,-3.6 v1(67.7,-4.3) ; 67,-3.6 v1(67,-4.3) v1(67.7,-4.3)
  Bottom Layer w1: C716.2@66.786,1.4 C716.2@66.986,1.4 ; C717.2 C717.2@66.986,-1.186 ; C716.2@67.3,1.014 68.3,2.014 v1(68.3,2.6) v1(67.5,2.6) ; v1@67.3,2.6 v1(67.5,2.6) ; C716.2@67.5,1.714 v1(67.5,2.6) ; C728.1 C727.1
  Bottom Layer w1.5: J01.8 J01.4
GND_In: C751.2 C752.1 C754.2 C755.2 C756.2 C757.2 C758.2 D751.A D753.A D754.A J750.2 J751.2 J752.2 L700.3 R751.2 R754.2 U750.7 U750.EP@35.2,-0.4 | length 60.2
  Top Layer w0.7: L700.3 46,3.375 v1(46,4.1)
  Layer 1 w0.7: J752.2 10.25,-1.75 J750.2 ; v1(30.7,3.5) 35.7,3.5 36.5,2.7 ; v1(32.4,-4.3) 35.2,-1.5 v1(35.2,-1.1) v1(35.2,-0.4) v1(35.2,0.3) 35.2,1.4 36.5,2.7 ; v1(40.1,-0.4) 40.1,0.4 ; v1(41.7,-0.4) 41.7,0.4 ; v1(43,-0.4) 43,0.1 43.3,0.4 ; v1(46,4.1) 46,3.1 43.3,0.4 ; 36.5,2.7 37.8,2.7 40.1,0.4 ; 40.1,0.4 41.7,0.4 ; 41.7,0.4 43.3,0.4
  Layer 2 w0.7: v1(35.2,-1.1) v1(35.2,-0.4) v1(35.2,0.3)
  Bottom Layer w0.3: U750.7 34.45,-1.65 35.2,-0.9 v1(35.2,-0.4)
  Bottom Layer w0.7: D753.A 30,-4.1 D754.A 31.6,-4.3 v1(32.4,-4.3) ; C752.1 30,2.8 v1(30.7,3.5) ; R751.2 37.525,-3.9 38.525,-3.9 R754.2 ; 39.4,-4.5 38.7,-3.8 R754.2 ; v1(40.1,-0.4) C757.2 ; 40.118,-3.725 R754.2 ; v1(41.7,-0.4) C756.2 ; v1(43,-0.4) 43,0.657 C755.2 ; C754.2 45.657,4.1 v1(46,4.1) 46.343,4.1 C758.2
  Bottom Layer w2: J750.2 15.025,-3.615 C751.2 19.486,-3.615 D751.A@19.8,-3.3
HG: Q750.1 U750.8 | length 5.1
  Top Layer w0.7: v1(32.8,-2.2) 33.14,-2.54 Q750.1
  Bottom Layer w0.3: v1(32.8,-2.2) 32.8,-1.7 33.35,-1.15 U750.8
ILIM: R705.1 U701.7 | length 1.3
  Top Layer w0.25: R705.1 79.4,-2.6 80,-2 U701.7
INTVCC: C712.1 U700.3 | length 3.5
  Top Layer w0.25: C712.1 62.775,-3.2 63.3,-3.2 63.95,-2.55 U700.3
NetC750_2: C750.2 C751.1 | length 5.2
  Top Layer w1: v1@14.2,-0.186 C750.2 15.715,-0.2 v1(16.8,-0.2)
  Bottom Layer w1: v1(14.2,-0.2) 15.486,-0.2 C751.1 16.786,-0.186 v1(16.8,-0.2)
NetD750_K: D750.K D751.K | length 6.5
  Bottom Layer w2: D751.K D750.K
NetF750_1: F750.1 J750.1 J752.1 | length 11.4
  Layer 2 w0.7: J752.1 10.25,1.75 J750.1 16.95,1.75 v1(17.2,1.5) v1(17.2,2.3) v1(17.2,3.1) v1(17.2,3.9) ; v1(16.5,1.9) v1(16.5,2.7) v1(16.5,3.5)
OV: R753.2 R754.1 U750.5 | length 7.6
  Bottom Layer w0.25: U750.5 37.15,-1.15 38.075,-2.075 R754.1 38.7,-1.4 38.5,-1.2 38.5,-0.1 39,0.4 39,1.5 38.5,2 R753.2
RT: R700.2 U700.17 | length 3.6
  Top Layer w0.3: R700.2 61.7,3.375 61.7,0.7 62.05,0.35 U700.17
SW: C714.2 L701.1 U700.8 U700.9 U700.10 | length 8
  Top Layer w0.3: U700.8 67.45,-0.65 L701.1@67.6,-0.5 ; U700.9 67.25,-0.15 L701.1 ; U700.10 67.45,0.35 L701.1 ; C714.2 67.6,-1.175 L701.1@67.6,-0.5 ; L701.1@67.6,-0.5 L701.1
TR/SS: C713.2 U700.18 | length 1.8
  Top Layer w0.3: C713.2 61.125,-0.15 U700.18
"V_ Bat_In": C750.1 D750.A F750.2 Q750.2 R750.1 R752.1 | length 38.2
  Top Layer w0.7: v1(23.9,-4.1) Q750.2@26,-2 ; v1(28.1,-4.1) Q750.2@26,-2 ; v1(30.4,-2.6) 28.6,-2.6 Q750.2 Q750.2@26,-2
  Top Layer w1: C750.1 16.586,-3.615 17.77,-2.43 F750.2
  Top Layer w2.4: F750.2 23.57,-2.43 Q750.2
  Layer 2 w0.7: v1(23.9,-4.1) v1(28.1,-4.1)
  Bottom Layer w0.7: v1(23.9,-4.1) 25.2,-4.1 D750.A 26.8,-4.1 v1(28.1,-4.1) ; v1(30.4,-2.6) 30.425,-2.625 R752.1 ; R752.1@31.5,-2.625 31.925,-2.625 32.5,-3.2 33.375,-3.2 R750.1
V_Bat: C754.1 C755.1 C756.1 C757.1 C758.1 J751.1 L700.4 Q751.D R753.1 U750.12 | length 43.2
  Top Layer w0.7: 40.5,0.8 40.5,1.765 ; 40.5,4.5 40.5,3.035 ; Q751.D@44.05,1.765 40.5,1.765 ; Q751.D@44.05,3.035 40.5,3.035 ; L700.4 46,1.225 v1(46,0.5) ; 40.5,1.765 40.5,3.035
  Layer 2 w0.3: v1(33.5,1.3) 34.9,2.7 40.1,2.7
  Layer 2 w0.7: v1(40.1,4.4) 40.1,2.7 v1(40.1,2.3) v1(41.7,2.3) ; v1(41.7,4.4) v1(41.7,2.3) ; v1(43,4.4) v1(43,2.3) ; v1(46,0.5) 44.8,0.5 v1(43,2.3) ; v1(41.7,2.3) v1(43,2.3)
  Bottom Layer w0.3: v1(33.5,1.3) 33.5,1 33.65,0.85 U750.12
  Bottom Layer w0.7: R753.1 39.925,4.225 v1(40.1,4.4) C757.1 v1(40.1,2.3) ; v1(41.7,2.3) C756.1 v1(41.7,4.4) ; v1(43,2.3) 43,2.943 C755.1 43,3.543 v1(43,4.4) ; C754.1 45.657,0.5 v1(46,0.5) 46.343,0.5 C758.1
V_Bat_Filt: C700.1 C701.1 C702.1 C703.1 C704.1 C705.1 C706.1 C707.1 C708.1 C709.1 C710.2 C711.2 C729.1 C730.1 C731.1 C732.1 C733.1 C734.1 C735.1 C736.1 C737.1 C738.1 C739.1 C740.1 C741.1 L700.1@50.675,1.3 U700.6 U700.11 U700.14 U700.M@62.387,0.912 U700.M@66.013,0.912 U700.M@66.013,-1.713 | length 70.7
  Top Layer w0.3: 63.5,2 63.95,1.55 U700.14 ; U700.6 65.45,-2.125 66.013,-2.688 C711.2 ; U700.11 65.45,1.725 66.013,2.288 C710.2
  Top Layer w0.4: U700.M@62.387,0.912 62.387,1.687 ; C711.2@66.013,-2.688 U700.M@66.013,-1.713 ; U700.M@66.013,0.912 C710.2@66.013,2.288
  Top Layer w0.5: 62.387,1.687 62.387,2.087 v1(62.7,2.4) ; 63.4,2.1 63.5,2
  Top Layer w0.7: C729.1 49.2,-0.5 v1(49.7,0) 49.7,0.325 50.675,1.3 51.3,0.675 v1(51.3,0) 50.8,-0.5 C730.1 ; v1(54.5,0) 55,0.5 C700.1@55,1.1 ; C700.1 C700.1@55,1.1 ; v1(56.1,0) C700.1@55,1.1 ; v1(62.7,2.4) 63.1,2.4 63.4,2.1 ; v1(66.1,-4.3) 66.1,-3.625 C711.2 ; v1(66.2,3.3) 66.225,3.275 C710.2
  Layer 2 w0.7: v1(49.7,0) v1(51.3,0) v1(52.9,0) v1(54.5,0) v1(56.1,0) v1(57.7,0) 60.3,0 60.3,-4.3 v1(66.1,-4.3) ; v1(62.7,2.4) 65.3,2.4 v1(66.2,3.3)
  Bottom Layer w0.7: C731.1 v1(49.7,0) C703.1 ; C732.1 v1(51.3,0) C704.1 ; C736.1 C709.1 ; C735.1 C708.1 ; C734.1 C707.1 ; C702.1 C706.1 C733.1 C737.1 C741.1 ; v1(62.7,2.4) 62.757,2.4 C740.1 C705.1 65.157,3.3 v1(66.2,3.3) ; C738.1 C739.1 65.457,-4.3 v1(66.1,-4.3)
V_Int: D752.A Q750.3 Q751.S U750.2 U750.9 | length 24.7
  Top Layer w0.7: v1(32.7,-0.8) 32.1,-0.8 31.6,-0.3 31.6,2.4 32.6,3.4 33.5,3.4 34.36,2.54 Q750.3 Q750.3@36.14,2.54 ; v1(37.2,1.6) Q750.3@37.2,2.3 ; Q751.S@38.55,1.765 38.135,1.765 Q750.3@37.4,2.5 ; Q751.S@38.55,3.035 37.935,3.035 Q750.3@37.4,2.5 ; Q751.S@38.55,4.305 37.905,4.305 Q750.3@36.14,2.54 ; Q750.3@36.14,2.54 Q750.3@36.96,2.54 ; Q750.3@36.96,2.54 37.36,2.54 Q750.3@37.4,2.5 ; Q750.3@36.96,2.54 Q750.3@37.2,2.3 ; Q750.3@37.2,2.3 Q750.3@37.4,2.5
  Bottom Layer w0.3: v1(32.7,-0.8) 32.85,-0.65 U750.9 ; U750.2 37.25,0.35 37.4,0.2 38.1,0.2 38.5,0.6 38.5,1.3 38.2,1.6 v1(37.2,1.6)
  Bottom Layer w0.7: D752.A 36.3,2.5 v1(37.2,1.6)
VBUS1: C727.2 J01.1 U701.9 | length 23.2
  Top Layer w0.3: U701.9 81,-2 81.5,-2.5 81.7,-2.5
  Top Layer w0.5: 83.4,-2.15 84.75,-2.15
  Top Layer w0.7: 81.7,-2.5 v1(82.4,-2.5) 82.7,-2.5 83.05,-2.15 83.4,-2.15
  Top Layer w1: 84.75,-2.15 85.25,-2.15 J01.1
  Layer 1 w0.5: 83.4,-2.15 84.75,-2.15
  Layer 1 w0.7: v1(82.4,-2.5) 82.7,-2.5 83.05,-2.15 83.4,-2.15
  Layer 1 w1: 84.75,-2.15 85.25,-2.15 J01.1
  Layer 2 w0.5: 83.4,-2.15 84.75,-2.15
  Layer 2 w0.7: v1(82.4,-2.5) 82.7,-2.5 83.05,-2.15 83.4,-2.15
  Layer 2 w1: 84.75,-2.15 85.25,-2.15 J01.1
  Bottom Layer w0.5: 83.4,-2.15 84.75,-2.15
  Bottom Layer w0.7: C727.2 81.7,-1.8 v1(82.4,-2.5) 82.7,-2.5 83.05,-2.15 83.4,-2.15
  Bottom Layer w1: 84.75,-2.15 85.25,-2.15 J01.1
VBUS2: C728.2 J01.5 U701.8 | length 14.1
  Top Layer w0.3: 80.5,-2.5 U701.8
  Top Layer w0.7: 80.5,-2.5 80.5,-2.9 80.8,-3.2
  Top Layer w1: 80.8,-3.2 81.2,-3.6 v1(82.4,-3.6) 83.88,-3.6 J01.5
  Layer 1 w1: v1(82.4,-3.6) 83.88,-3.6 J01.5
  Layer 2 w1: J01.5@83.88,-3.6 J01.5 J01.5@83.88,-3.6 ; J01.5@83.88,-3.6 v1(82.4,-3.6) J01.5@83.88,-3.6
  Bottom Layer w1: C728.2 81.343,-3.6 v1(82.4,-3.6) ; C728.2@81.2,-3.6 v1(82.4,-3.6) ; J01.5 83.88,-3.6 v1(82.4,-3.6)
VS: C752.2 C753.1 D752.K D753.K R752.2 U750.3 U750.4 U750.10 | length 19.5
  Top Layer w0.7: v1(33,2.5) 32.5,2 v1(32.5,0.1) 33.7,0.1 34.8,1.2 35.9,1.2 v1(37.7,-0.6)
  Bottom Layer w0.3: v1(32.5,0.1) 32.8,0.1 33.05,-0.15 U750.10 ; U750.4 37.65,-0.65 v1(37.7,-0.6) 37.4,-0.6 36.95,-0.15 U750.3
  Bottom Layer w0.7: D753.K 30,-1.1 31.275,-1.1 R752.2 C753.1 ; C752.2 C753.1 ; v1(32.5,0.1) 32.125,0.475 C753.1 ; v1(33,2.5) D752.K
pads on no net: D750.1 D751.1 J750.0 L700.1@51.2,0.4 Q751.1 U700.0 U700.1 U700.15 U700.16 U701.1@82,1.7 U702.1@87.4,1.7 U750.1@36.6,1.4 U750.EP@35.2,0.25 U750.EP@35.2,-1.05

## Polygon pours and split planes (outlines as drawn)
GND on Layer 1 "GND_L02_P024" (solid, remove dead copper, pour order 24): 48.6,-4.6 48.8,-4.8 75.5,-4.8 cw(c75.5,-13.45) 81.616,-7.333 ccw(c83.95,-5) 83.95,-8.3 99,-8.3 ccw(c99,-7.5) 99.8,-7.5 99.8,7.5 ccw(c99,7.5) 99,8.3 83.95,8.3 ccw(c83.95,5) 81.616,7.333 cw(c75.5,13.45) 75.5,4.8 48.8,4.8 48.6,4.6
GND_In on Layer 1 "GND_IN_L02_P023" (solid, remove dead copper, pour order 23): 0.2,-4 ccw(c1,-4) 1,-4.8 47.8,-4.8 48,-4.6 48,4.6 47.8,4.8 1,4.8 ccw(c1,4) 0.2,4
no net on Layer 1 "NONET_L02_P000" (solid, remove dead copper, pour order 0): 41,-4.8
"V_ Bat_In" on Layer 2 "V__BAT_IN_L03_P021" (solid, remove dead copper, pour order 21): 0.2,-4 ccw(c1,-4) 1,-4.8 32.8,-4.8 33,-4.6 33,4.6 32.8,4.8 1,4.8 ccw(c1,4) 0.2,4
+5V on Layer 2 "+5V_L03_P019" (solid, remove dead copper, pour order 19): 69.4,-4.8 75.5,-4.8 cw(c75.5,-13.45) 81.616,-7.333 ccw(c83.95,-5) 83.95,-8.3 99,-8.3 ccw(c99,-7.5) 99.8,-7.5 99.8,7.5 ccw(c99,7.5) 99,8.3 83.95,8.3 ccw(c83.95,5) 81.616,7.333 cw(c75.5,13.45) 75.5,4.8 69.4,4.8 69.2,4.6 69.2,-4.6
V_Bat on Layer 2 "V_BAT_L03_P022" (solid, remove dead copper, pour order 22): 33.2,-4.6 33.4,-4.8 47.8,-4.8 48,-4.6 48,4.6 47.8,4.8 33.4,4.8 33.2,4.6
V_Bat_Filt on Layer 2 "V_BAT_FILT_L03_P020" (solid, remove dead copper, pour order 20): 48.6,-4.6 48.8,-4.8 68.8,-4.8 69,-4.6 69,4.6 68.8,4.8 48.8,4.8 48.6,4.6
GND on Top Layer "GND_L01_P018" (solid, remove dead copper, pour order 18): 48.6,-4.6 48.8,-4.8 75.5,-4.8 cw(c75.5,-13.45) 81.616,-7.333 ccw(c83.95,-5) 83.95,-8.3 99,-8.3 ccw(c99,-7.5) 99.8,-7.5 99.8,7.5 ccw(c99,7.5) 99,8.3 83.95,8.3 ccw(c83.95,5) 81.616,7.333 cw(c75.5,13.45) 75.5,4.8 48.8,4.8 48.6,4.6
GND_In on Top Layer "GND_IN_L01_P017" (solid, remove dead copper, pour order 17): 0.2,-4 ccw(c1,-4) 1,-4.8 47.8,-4.8 48,-4.6 48,4.6 47.8,4.8 1,4.8 ccw(c1,4) 0.2,4
GND on Bottom Layer "GND_L04_P026" (solid, remove dead copper, pour order 26): 48.6,-4.6 48.8,-4.8 75.5,-4.8 cw(c75.5,-13.45) 81.616,-7.333 ccw(c83.95,-5) 83.95,-8.3 99,-8.3 ccw(c99,-7.5) 99.8,-7.5 99.8,7.5 ccw(c99,7.5) 99,8.3 83.95,8.3 ccw(c83.95,5) 81.616,7.333 cw(c75.5,13.45) 75.5,4.8 48.8,4.8 48.6,4.6
GND_In on Bottom Layer "GND_IN_L04_P025" (solid, remove dead copper, pour order 25): 0.2,-4 ccw(c1,-4) 1,-4.8 47.8,-4.8 48,-4.6 48,4.6 47.8,4.8 1,4.8 ccw(c1,4) 0.2,4

## Keep-outs
Top Layer:
  circle w0.1: c5.25,0 r2
Layer 1:
  circle w0.1: c5.25,0 r2
Layer 2:
  circle w0.1: c5.25,0 r2
Bottom Layer:
  circle w0.1: c5.25,0 r2

## Other copper
Top Layer:
  region net NetF750_1: 8.25,0.25 13.25,0.25 14,1 18,1 18.25,1.25 20.8,1.25 21,1.45 21,3.4 20.8,3.6 18.3,3.6 17.6,4.3 12.3,4.3 11.75,3.75 8.25,3.75
  region net V_Bat: 39.475,4.63 39.475,0.17 43.23,0.17 44.25,-0.85 44.25,-4.25 47.75,-4.25 47.75,1.9 47.55,2.1 45.7,2.1 45,2.8 45,4.055 44.425,4.63
Layer 1:
  region net NetF750_1: 8.25,0.25 13.25,0.25 14,1 17.3,1 17.7,1.4 17.7,4 17.4,4.3 12.3,4.3 11.75,3.75 8.25,3.75
Layer 2:
  region net NetF750_1: 8.25,0.25 13.25,0.25 14,1 17.3,1 17.7,1.4 17.7,4 17.4,4.3 12.3,4.3 11.75,3.75 8.25,3.75
Bottom Layer:
  region net NetF750_1: 8.25,0.25 13.25,0.25 14,1 17.3,1 17.55,1.25 17.55,4.15 17.4,4.3 12.3,4.3 11.75,3.75 8.25,3.75

## Silkscreen, mask and mechanical layers (free items; w line width, h text height)
Top Overlay:
  text "buck_automotive" at 97.182,6.678 h2 r270
  text "'.Print_Date'" at 93.145,4.293 h2 r270
  text "daniw" at 95.349,2.303 h2 r270
Bottom Overlay:
  text "daniw" at 95.349,-2.303 h2 r270
  text "'.Print_Date'" at 93.145,-4.293 h2 r270
  text "buck_automotive" at 97.182,-6.678 h2 r270
Board:
  the board outline again, w0.2
Drill Drawing:
  lines w0.2: 75.5,4.8 ccw(c75.5,13.45) 81.616,7.333 ; 75.5,4.8 69.4,4.8 69.2,4.6 69.2,-4.6 69.4,-4.8 75.5,-4.8 ; 81.616,7.333 cw(c83.95,5) 83.95,8.3 99,8.3 cw(c99,7.5) 99.8,7.5 99.8,-7.5 cw(c99,-7.5) 99,-8.3 83.95,-8.3 cw(c83.95,-5) 81.616,-7.333 ccw(c75.5,-13.45) 75.5,-4.8 ; 75.5,-4.8 75.5,-4.8 ; 75.5,-4.8 75.5,-4.8 ; 0.2,-4 ccw(c1,-4) 1,-4.8 32.8,-4.8 33,-4.6 33,4.6 32.8,4.8 1,4.8 ccw(c1,4) 0.2,4 0.2,-4 ; 33.2,-4.6 33.4,-4.8 47.8,-4.8 48,-4.6 48,4.6 47.8,4.8 33.4,4.8 33.2,4.6 33.2,-4.6 ; 48.6,-4.6 48.6,4.6 48.8,4.8 68.8,4.8 69,4.6 69,-4.6 68.8,-4.8 48.8,-4.8 48.6,-4.6
Top Assembly:
  lines w0.2: 63.5,5.2 64.6,5.2 ; 64.6,8.4 64.6,5.2 ; 71.8,7 71.8,5.9 ; 74.6,5.9 71.8,5.9 ; 60.8,2.1 60.941,2.524 61.224,2.241 60.8,2.1 ; 60.8,2.1 61.4,2.7 62.1,2.7 64.6,5.2 ; 71.2,2.5 71.4,2.9 71,2.9 71.2,2.5 ; 71.2,2.5 71.2,5.3 71.8,5.9
Bottom Assembly:
  lines w0.2: 30.8,-7.7 34,-7.7 ; 34,-6.5 34,-7.7 ; 34,-7.7 34.9,-6.8 34.9,-3.2 ; 34.9,-3.2 35.1,-3.6 34.7,-3.6 34.9,-3.2

## Text inside footprints (layer, text, board x,y; h text height)
J750: Top Overlay "1" at 12.687,3.222 h1.5 r270; Bottom Overlay "1" at 12.67,2.853 h1.5 r270